# Altium PCB HumFlex3.PcbDoc
Units mm, origin at the board's own origin, x right, y up, seen from the top; angles counter-clockwise.
Board outline 87 x 100 mm, 2 copper layers (Top Layer, Bottom Layer), stack 0.187 mm thick; 35 components, 18 nets, 191 pads, 848 vias.
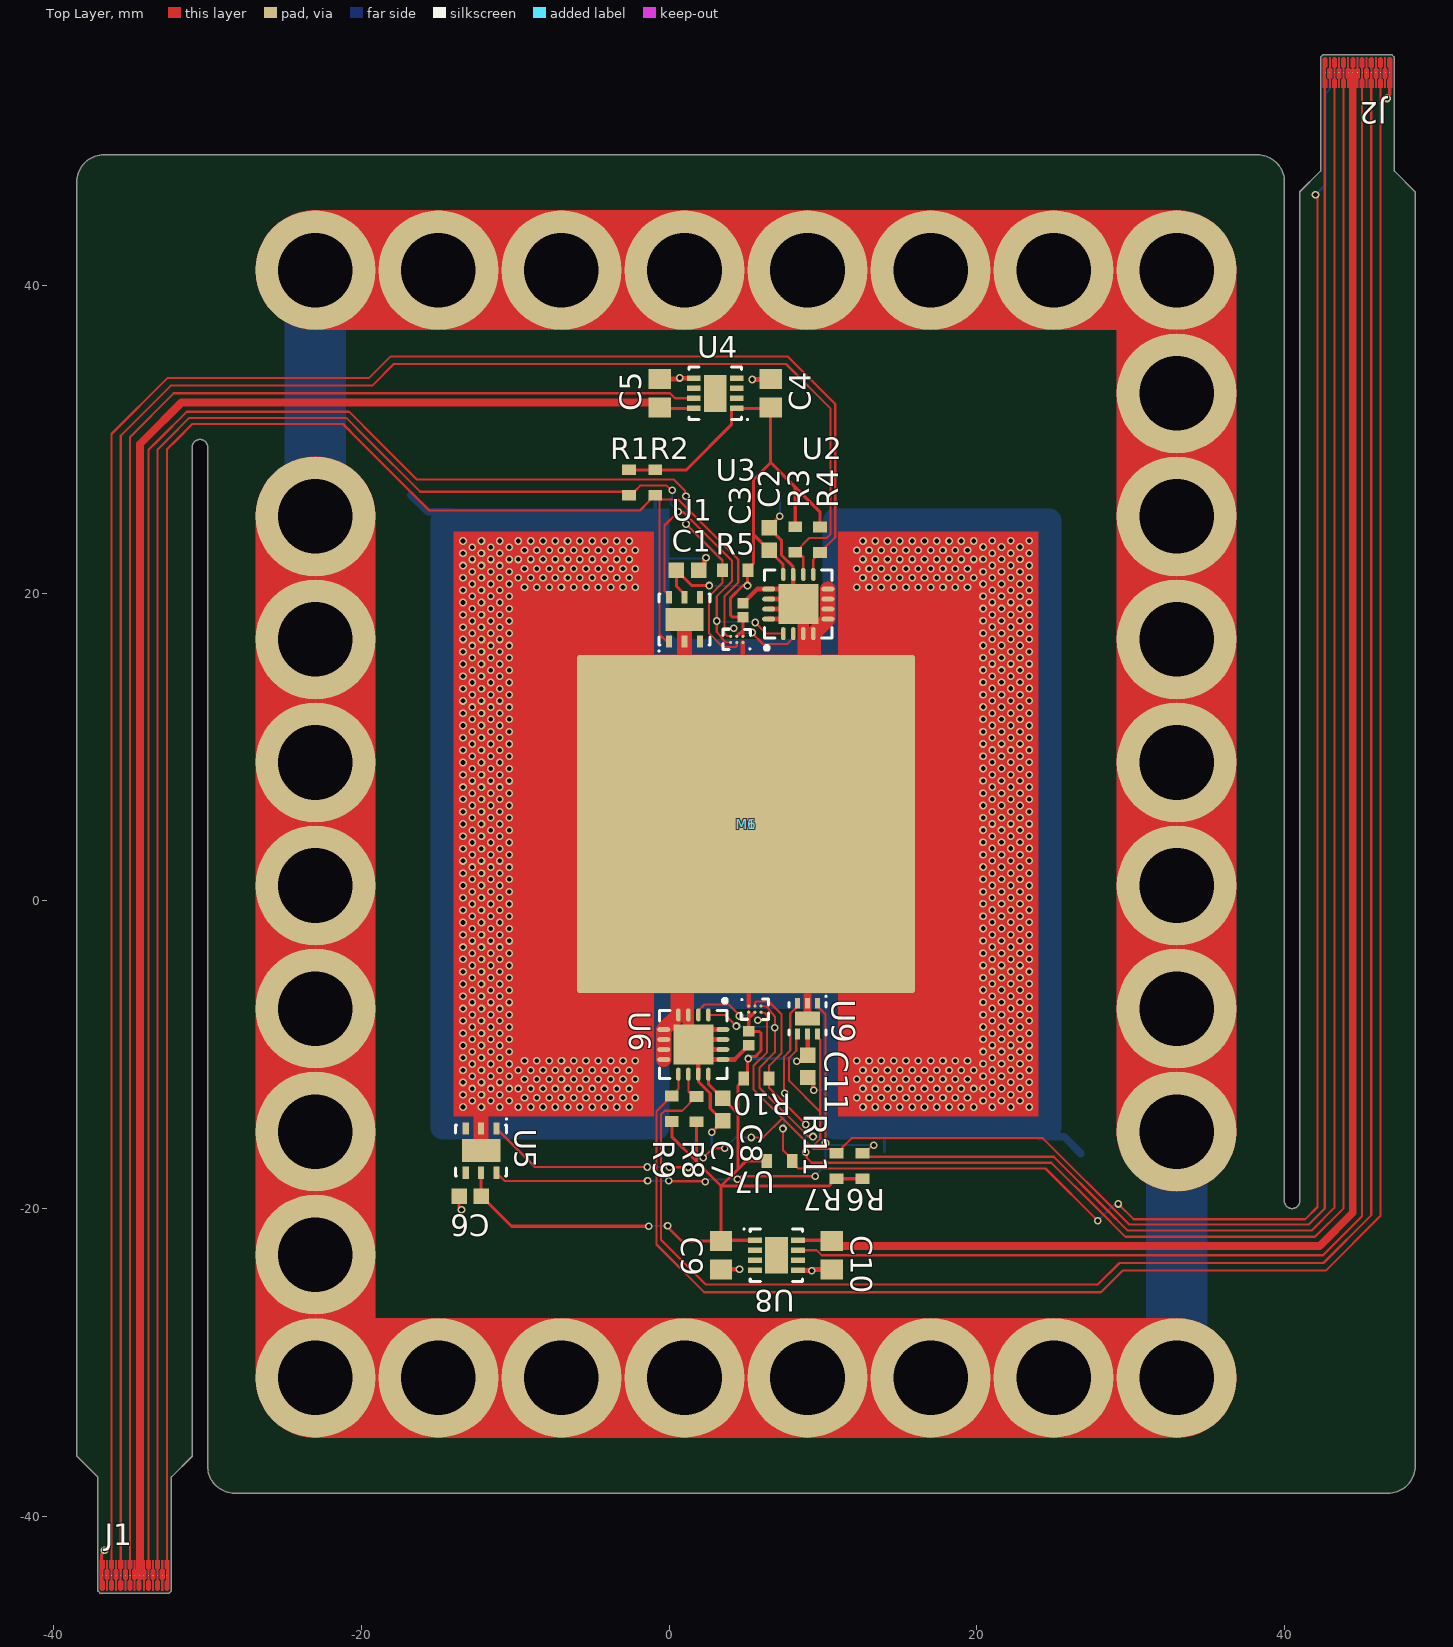
[diagram p0: Top Layer view]
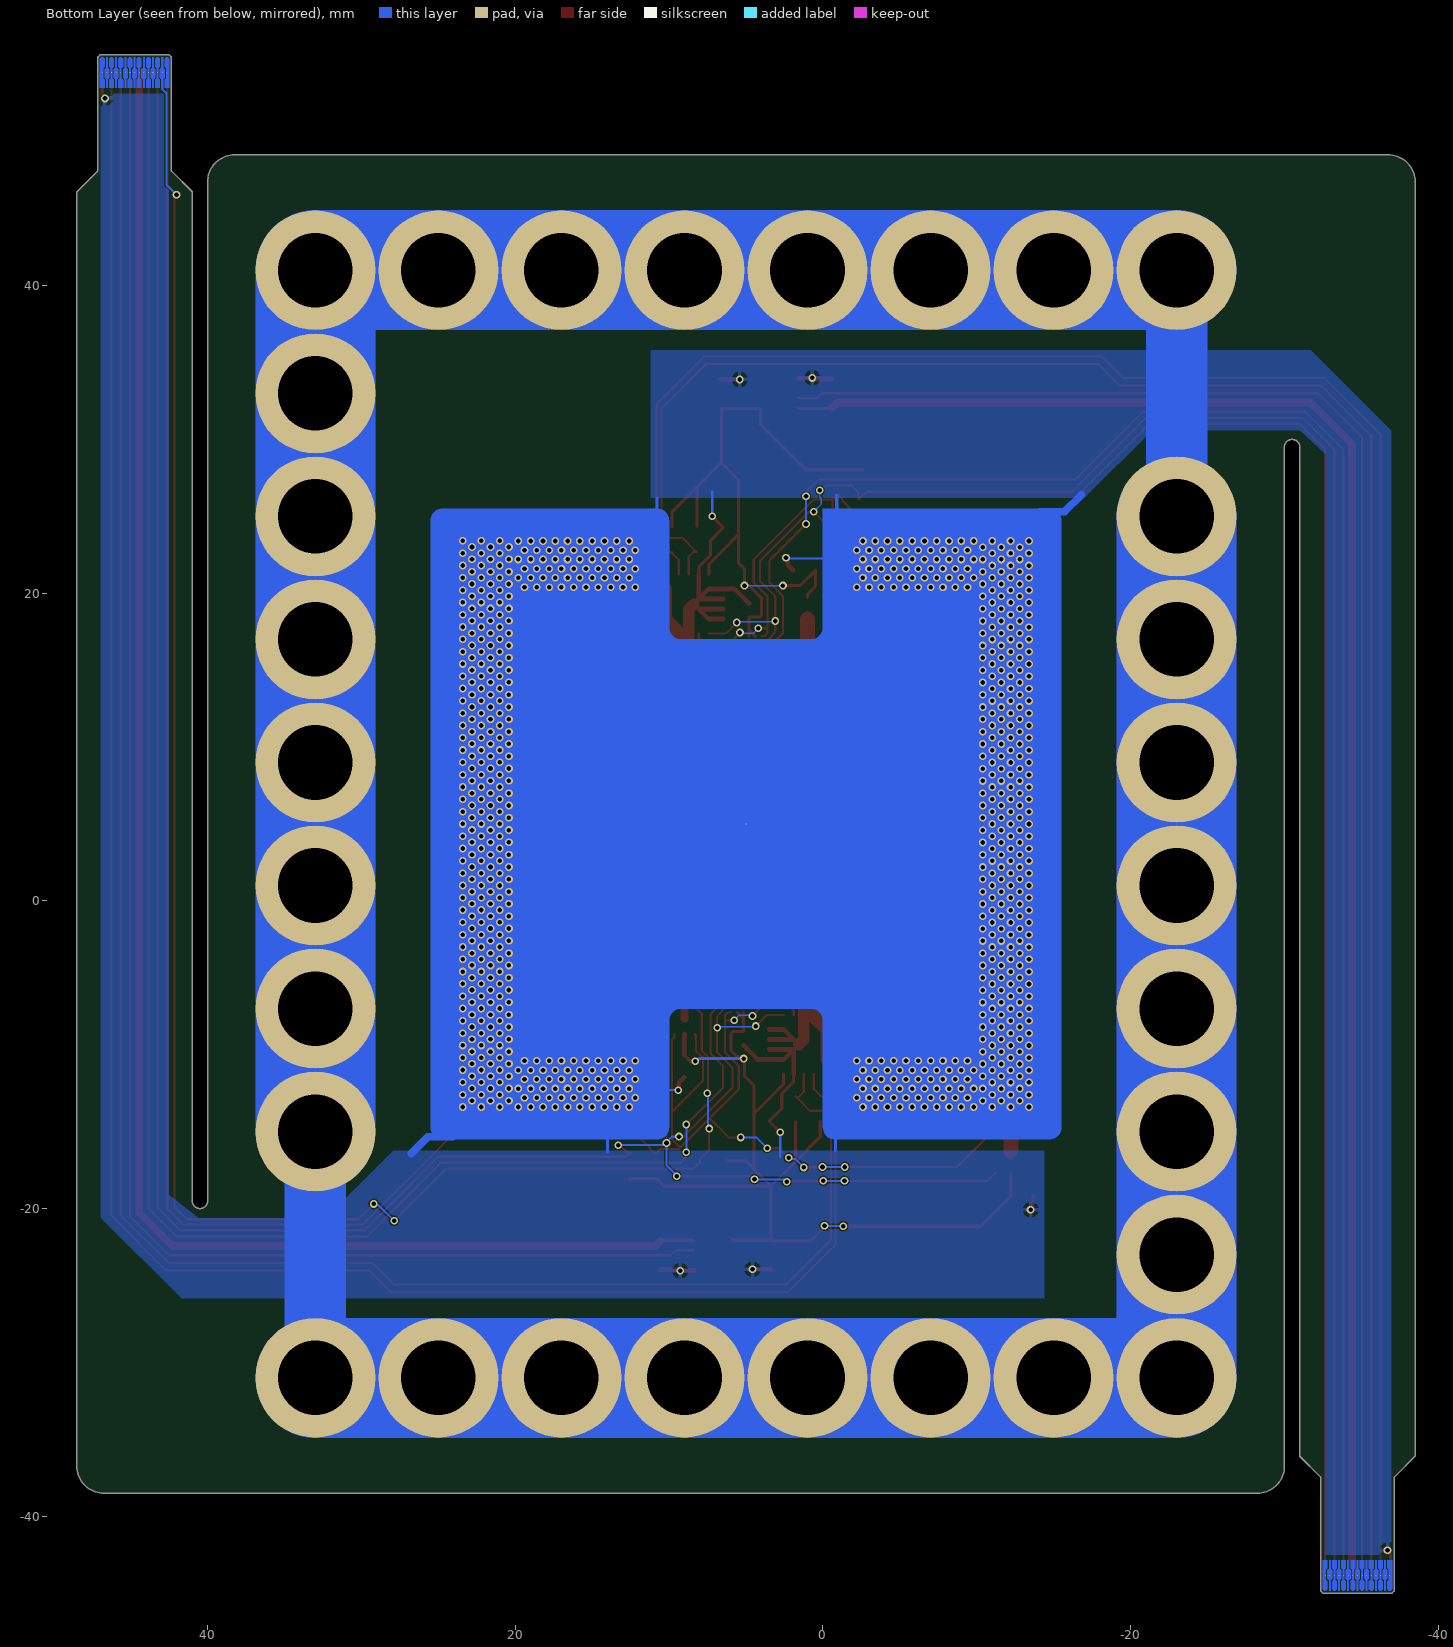
[diagram p1: Bottom Layer view, seen from below]

## Layer stack, top to bottom
Stiffener 1: core 0.1016, Core-009, Dk 4.5
Board Layer Stack Top Coverlay: solder mask 0.012, FC-001, Dk 4
Top Layer: signal copper 0.0175
Dielectric 1: core 0.0508, Core-001, Dk 4.1
Bottom Layer: signal copper 0.0175
Board Layer Stack Bottom Coverlay: solder mask 0.012, FC-001, Dk 4

## Board outline
-37,-45 -32.5,-45 -32.35,-44.85 -32.35,-37.45 -31,-36.1 -31,-30 -31,29.5 cw(c-30.5,29.5) -30.5,30 cw(c-30.5,29.5) -30,29.5 -30,-36.747 ccw(c-28.247,-36.747) -28.247,-38.5 46.747,-38.5 ccw(c46.747,-36.747) 48.5,-36.747 48.5,46.1 47.15,47.45 47.15,54.85 47,55 42.5,55 42.35,54.85 42.35,47.45 41,46.1 41,-19.5 cw(c40.5,-19.5) 40.5,-20 cw(c40.5,-19.5) 40,-19.5 40,46.747 ccw(c38.247,46.747) 38.247,48.5 -36.747,48.5 ccw(c-36.747,46.747) -38.5,46.747 -38.5,30 -38.5,-36.1 -37.15,-37.45 -37.15,-44.85

## Design rules (kind name [scope] priority, off if disabled: settings)
Clearance [All] p1: gap=0.08 ignorepadtopadclearanceinfootprint=FALSE
ComponentClearance ComponentClearance_1 [InComponent('M6')] p1: gap=0 collisioncheckmode=3 verticalgap=0 showdistances=FALSE donotcheckwithout3dbody=TRUE
ComponentClearance ComponentClearance_2 [InComponent('M1')] p2: gap=0 collisioncheckmode=3 verticalgap=0 showdistances=FALSE donotcheckwithout3dbody=TRUE
ComponentClearance [All] p3: gap=0.254 collisioncheckmode=3 verticalgap=0.254 showdistances=FALSE
HoleSize [All] p1: absolutevalues=TRUE maxlimit=6 minlimit=0.2 maxpercent=80.000 minpercent=20.000
HoleToHoleClearance [All] p1: gap=0.3 allowstackedmicrovias=TRUE
MinimumAnnularRing [All] p1: minimumring=0.1
MinimumSolderMaskSliver [HasFootprint('PeltierElement')] p1: minsoldermaskwidth=0
MinimumSolderMaskSliver MinimumSolderMaskSliver_1 [All] p2: minsoldermaskwidth=0
PolygonConnect [All] p1: connectstyle=Relief reliefconductorwidth=0.254 reliefentries=4 polygonreliefangle="90 Angle" airgapwidth=0.254
RoutingVias [All] p1: holewidth=0.711 width=1.27 viastyle="Through Hole" minholewidth=0.711 minwidth=1.27 maxholewidth=0.711 maxwidth=1.27
SilkToSilkClearance [All] p1: silktosilkclearance=0.15
SilkToSolderMaskClearance [IsPad] p1: minsilkscreentomaskgap=0.15 clearancetoexposedcopper=TRUE
SolderMaskExpansion [All] p1: expansion=0.1 istentingtop=FALSE
Width [All] p1: maxlimit=8 minlimit=0.08 preferedwidth=0.2
24 further rules are at their usual default settings.

## Classes and differential pairs
component class HumFlex2_upper: C1 C2 C3 C4 C5 J1 R1 R2 R3 R4 R5 U1 U2 U3 U4
component class HumFlex2_mech: M1 M6
component class HumFlex2_lower: C6 C7 C8 C9 C10 C11 J2 R6 R7 R8 R9 R10 R11 U5 U6 U7 U8 U9

## Components (designator, comment, footprint, x,y, rotation, side; value= is the part's Value field where it differs from the comment)
C1 "100nF" CAP_SM0603_YAGEOCC2_N 1.2,21.5 r180 top
C2 "100nF" CAP_SM0603_YAGEOCC2_N 6.5,23.527 r270 top
C3 "10nF" CAP_SM0402_YAGEOCC2_N 4.8,18.9 r90 top
C4 "1uF" CAP_SM0805_YAGEOCC2_N 6.6,33 r270 top
C5 "1uF" CAP_SM0805_YAGEOCC2_N -0.6,33 r270 top
C6 "100nF" CAP_SM0603_YAGEOCC2_N -12.927,-19.2 r0 top
C7 "100nF" CAP_SM0603_YAGEOCC2_N 3.475,-13.564 r90 top
C8 "10nF" CAP_SM0402_YAGEOCC2_N 5.175,-8.937 r270 top
C9 "1uF" CAP_SM0805_YAGEOCC2_N 3.375,-23.037 r90 top
C10 "1uF" CAP_SM0805_YAGEOCC2_N 10.575,-23.037 r90 top
C11 "100nF" CAP_SM0603_YAGEOCC2_N 9.025,-10.75 r90 top
J1 "Dual Row 15Pos FPC Contacts" AYF331535_FPC -32.65,-44.85 r180 top
J2 "Dual Row 15Pos FPC Contacts" AYF331535_FPC 42.65,54.85 r0 top
M1 "Peltier Element" PeltierElement2 5,5 r90 top locked
M6 "Lego_Mount" LEGO_MOUNT 5,5 r0 top
R1 "10K" RES_SM0603_YAGEORC_N -2.6,27.2 r90 top
R2 "10K" RES_SM0603_YAGEORC_N -0.9,27.2 r90 top
R3 "10K" RES_SM0603_YAGEORC_N 8.2,23.5 r90 top
R4 "10K" RES_SM0603_YAGEORC_N 9.8,23.473 r90 top
R5 "10K" RES_SM0603_YAGEORC_N 4.3,21.5 r0 top
R6 "10K" RES_SM0603_YAGEORC_N 12.575,-17.237 r270 top
R7 "10K" RES_SM0603_YAGEORC_N 10.875,-17.237 r270 top
R8 "10K" RES_SM0603_YAGEORC_N 1.775,-13.537 r270 top
R9 "10K" RES_SM0603_YAGEORC_N 0.175,-13.51 r270 top
R10 "10K" RES_SM0603_YAGEORC_N 5.675,-11.537 r180 top
R11 "10K" RES_SM0603_YAGEORC_N 7.173,-16.9 r180 top
U1 "SI7051-A20-IMR" SI7050/1/2/3/4/5 1,18.3 r90 top
U2 "ADT7422CCPZ-RL7" ADT7422_QFN 8.4,19.3 r90 top
U3 "AS6221" AS6221_BGA 4.4,17 r180 top
U4 "TPS78433" TPS784xxxQDRBRQ1_SON 3,33 r180 top
U5 "SI7051-A20-IMR" SI7050/1/2/3/4/5 -12.225,-16.235 r270 top
U6 "ADT7422CCPZ-RL7" ADT7422_QFN 1.575,-9.337 r270 top
U7 "AS6221" AS6221_BGA 5.575,-7.037 r0 top
U8 "TPS78433" TPS784xxxQDRBRQ1_SON 6.975,-23.037 r0 top
U9 "TMP117" TMP117(N/M)AIDRV_WSON 9,-7.65 r270 top

## Footprints (in the part's own frame and the unit in brackets; to place one, negate y for a bottom-side part, rotate by r counter-clockwise, add the part's x,y. Pads: shape width x height; smd on the part's side, far side on the other; paste and mask are expansions set on the pad)
ADT7422_QFN [mm] "QFN, 16-Leads, Body 4,00x4,00mm, Pitch 0,65mm, Thermal Pad 2,60x2,60mm, IPC Medium Density"
  oval 0.85x0.3 smd: 1(-1.925,0.975) 2(-1.925,0.325) 3(-1.925,-0.325) 4(-1.925,-0.975) 9(1.925,-0.975) 10(1.925,-0.325) 11(1.925,0.325) 12(1.925,0.975)
  oval 0.3x0.85 smd: 5(-0.975,-1.925) 6(-0.325,-1.925) 7(0.325,-1.925) 8(0.975,-1.925) 13(0.975,1.925) 14(0.325,1.925) 15(-0.325,1.925) 16(-0.975,1.925)
  rect 2.6x2.6 smd: 17(0,0)
  silkscreen extent -2.97,-2.2 2.2,2.2, body extent -2.05,-2.05 2.05,2.05, height 0.8
AS6221_BGA [mm] "BGA, 6-Leads, Body 1,02x1,50mmx0,53mm, Pitch 0,40mm"
  round 0.2 smd: A1(-0.4,0.2) A2(0,0.2) A3(0.4,0.2) B1(-0.4,-0.2) B2(0,-0.2) B3(0.4,-0.2)
  silkscreen extent -0.9,-0.66 0.89,0.66, body extent -0.74,-0.51 0.74,0.51, height 0.55
AYF331535_FPC [mil]
  round 1 all layers, no hole paste-99999 mask+3.94: 1(0,-39.37) 2(11.81,-39.37)
  round 1 all layers, no hole paste-99999: 3(23.62,-39.37) 4(35.43,-39.37) 5(47.24,-39.37) 6(59.06,-39.37) 7(70.87,-39.37) 8(82.68,-39.37) 9(94.49,-39.37) 10(106.3,-39.37) 11(118.11,-39.37) 12(129.92,-39.37) 13(141.73,-39.37) 14(153.54,-39.37) 15(165.35,-39.37)
  Top Layer region: -5.91,-78.74 -5.91,-3.94 -1.97,0 -1.97,0 1.97,0 5.91,-3.94 5.91,-24.61 1.97,-28.54 1.97,-54.13 5.91,-58.07 5.91,-78.74
  Top Layer region: 5.91,-52.17 5.91,-30.51 9.84,-26.57 9.84,0 13.78,0 13.78,-26.57 17.72,-30.51 17.72,-52.17 13.78,-56.1 13.78,-78.74 9.84,-78.74 9.84,-56.1
  Top Layer region: 17.72,-78.74 17.72,-58.07 21.65,-54.13 21.65,-28.54 17.72,-24.61 17.72,-3.94 21.65,0 25.59,0 29.53,-3.94 29.53,-24.61 25.59,-28.54 25.59,-54.13 29.53,-58.07 29.53,-78.74
  Top Layer region: 29.53,-52.17 29.53,-30.51 33.46,-26.57 33.46,0 37.4,0 37.4,-26.57 41.34,-30.51 41.34,-52.17 37.4,-56.1 37.4,-78.74 33.46,-78.74 33.46,-56.1
  Top Layer region: 41.34,-78.74 41.34,-58.07 45.28,-54.13 45.28,-28.54 41.34,-24.61 41.34,-3.94 45.28,0 49.21,0 53.15,-3.94 53.15,-24.61 49.21,-28.54 49.21,-54.13 53.15,-58.07 53.15,-78.74
  Top Layer region: 64.96,-78.74 64.96,-58.07 68.9,-54.13 68.9,-28.54 64.96,-24.61 64.96,-3.94 68.9,0 72.83,0 76.77,-3.94 76.77,-24.61 72.83,-28.54 72.83,-54.13 76.77,-58.07 76.77,-78.74
  Top Layer region: 53.15,-52.17 53.15,-30.51 57.09,-26.57 57.09,0 61.02,0 61.02,-26.57 64.96,-30.51 64.96,-52.17 61.02,-56.1 61.02,-78.74 57.09,-78.74 57.09,-56.1
  Top Layer region: 76.77,-52.17 76.77,-30.51 80.71,-26.57 80.71,0 84.65,0 84.65,-26.57 88.58,-30.51 88.58,-52.17 84.65,-56.1 84.65,-78.74 80.71,-78.74 80.71,-56.1
  Top Layer region: 88.58,-78.74 88.58,-58.07 92.52,-54.13 92.52,-28.54 88.58,-24.61 88.58,-3.94 92.52,0 96.46,0 100.39,-3.94 100.39,-24.61 96.46,-28.54 96.46,-54.13 100.39,-58.07 100.39,-78.74
  Top Layer region: 100.39,-52.17 100.39,-30.51 104.33,-26.57 104.33,0 108.27,0 108.27,-26.57 112.2,-30.51 112.2,-52.17 108.27,-56.1 108.27,-78.74 104.33,-78.74 104.33,-56.1
  Top Layer region: 112.2,-78.74 112.2,-58.07 116.14,-54.13 116.14,-28.54 112.2,-24.61 112.2,-3.94 116.14,0 120.08,0 124.02,-3.94 124.02,-24.61 120.08,-28.54 120.08,-54.13 124.02,-58.07 124.02,-78.74
  Top Layer region: 124.02,-52.17 124.02,-30.51 127.95,-26.57 127.95,0 131.89,0 131.89,-26.57 135.83,-30.51 135.83,-52.17 131.89,-56.1 131.89,-78.74 127.95,-78.74 127.95,-56.1
  Top Layer region: 135.83,-78.74 135.83,-58.07 139.76,-54.13 139.76,-28.54 135.83,-24.61 135.83,-3.94 139.76,0 143.7,0 147.64,-3.94 147.64,-24.61 143.7,-28.54 143.7,-54.13 147.64,-58.07 147.64,-78.74
  Top Layer region: 147.64,-52.17 147.64,-30.51 151.57,-26.57 151.57,0 155.51,0 155.51,-26.57 159.45,-30.51 159.45,-52.17 155.51,-56.1 155.51,-78.74 151.57,-78.74 151.57,-56.1
  Top Layer region: 159.45,-78.74 159.45,-58.07 163.39,-54.13 163.39,-54.13 163.39,-28.54 159.45,-24.61 159.45,-24.61 159.45,-3.94 163.39,0 167.32,0 171.26,-3.94 171.26,-78.74
  Bottom Layer region: -5.91,-78.74 -5.91,-3.94 -1.97,0 -1.97,0 1.97,0 5.91,-3.94 5.91,-24.61 1.97,-28.54 1.97,-54.13 5.91,-58.07 5.91,-78.74
  Bottom Layer region: 5.91,-52.17 5.91,-30.51 9.84,-26.57 9.84,0 13.78,0 13.78,-26.57 17.72,-30.51 17.72,-52.17 13.78,-56.1 13.78,-78.74 9.84,-78.74 9.84,-56.1
  Bottom Layer region: 17.72,-78.74 17.72,-58.07 21.65,-54.13 21.65,-28.54 17.72,-24.61 17.72,-3.94 21.65,0 25.59,0 29.53,-3.94 29.53,-24.61 25.59,-28.54 25.59,-54.13 29.53,-58.07 29.53,-78.74
  Bottom Layer region: 29.53,-52.17 29.53,-30.51 33.46,-26.57 33.46,0 37.4,0 37.4,-26.57 41.34,-30.51 41.34,-52.17 37.4,-56.1 37.4,-78.74 33.46,-78.74 33.46,-56.1
  Bottom Layer region: 41.34,-78.74 41.34,-58.07 45.28,-54.13 45.28,-28.54 41.34,-24.61 41.34,-3.94 45.28,0 49.21,0 53.15,-3.94 53.15,-24.61 49.21,-28.54 49.21,-54.13 53.15,-58.07 53.15,-78.74
  Bottom Layer region: 64.96,-78.74 64.96,-58.07 68.9,-54.13 68.9,-28.54 64.96,-24.61 64.96,-3.94 68.9,0 72.83,0 76.77,-3.94 76.77,-24.61 72.83,-28.54 72.83,-54.13 76.77,-58.07 76.77,-78.74
  Bottom Layer region: 53.15,-52.17 53.15,-30.51 57.09,-26.57 57.09,0 61.02,0 61.02,-26.57 64.96,-30.51 64.96,-52.17 61.02,-56.1 61.02,-78.74 57.09,-78.74 57.09,-56.1
  Bottom Layer region: 76.77,-52.17 76.77,-30.51 80.71,-26.57 80.71,0 84.65,0 84.65,-26.57 88.58,-30.51 88.58,-52.17 84.65,-56.1 84.65,-78.74 80.71,-78.74 80.71,-56.1
  Bottom Layer region: 88.58,-78.74 88.58,-58.07 92.52,-54.13 92.52,-28.54 88.58,-24.61 88.58,-3.94 92.52,0 96.46,0 100.39,-3.94 100.39,-24.61 96.46,-28.54 96.46,-54.13 100.39,-58.07 100.39,-78.74
  Bottom Layer region: 100.39,-52.17 100.39,-30.51 104.33,-26.57 104.33,0 108.27,0 108.27,-26.57 112.2,-30.51 112.2,-52.17 108.27,-56.1 108.27,-78.74 104.33,-78.74 104.33,-56.1
  Bottom Layer region: 112.2,-78.74 112.2,-58.07 116.14,-54.13 116.14,-28.54 112.2,-24.61 112.2,-3.94 116.14,0 120.08,0 124.02,-3.94 124.02,-24.61 120.08,-28.54 120.08,-54.13 124.02,-58.07 124.02,-78.74
  Bottom Layer region: 124.02,-52.17 124.02,-30.51 127.95,-26.57 127.95,0 131.89,0 131.89,-26.57 135.83,-30.51 135.83,-52.17 131.89,-56.1 131.89,-78.74 127.95,-78.74 127.95,-56.1
  Bottom Layer region: 135.83,-78.74 135.83,-58.07 139.76,-54.13 139.76,-28.54 135.83,-24.61 135.83,-3.94 139.76,0 143.7,0 147.64,-3.94 147.64,-24.61 143.7,-28.54 143.7,-54.13 147.64,-58.07 147.64,-78.74
  Bottom Layer region: 147.64,-52.17 147.64,-30.51 151.57,-26.57 151.57,0 155.51,0 155.51,-26.57 159.45,-30.51 159.45,-52.17 155.51,-56.1 155.51,-78.74 151.57,-78.74 151.57,-56.1
  Bottom Layer region: 159.45,-78.74 159.45,-58.07 163.39,-54.13 163.39,-54.13 163.39,-28.54 159.45,-24.61 159.45,-24.61 159.45,-3.94 163.39,0 167.32,0 171.26,-3.94 171.26,-78.74
CAP_SM0402_YAGEOCC2_N [mm] "Capacitor, Yageo CC Class2, SM0402, IPC Medium Density"
  rect 0.68x0.72 smd: 1(-0.45,0) 2(0.45,0)
  body extent -0.55,-0.35 0.55,0.35, height 0.6
CAP_SM0603_YAGEOCC2_N [mm] "Capacitor, Yageo CC Class2, SM0603, IPC Medium Density"
  rect 1x1 smd: 1(-0.727,0) 2(0.727,0)
  body extent -0.9,-0.5 0.9,0.5, height 0.9
CAP_SM0805_YAGEOCC2_N [mm] "Capacitor, Yageo CC Class2, SM0805, IPC Medium Density"
  rect 1.3x1.45 smd: 1(-0.927,0) 2(0.927,0)
  body extent -1.1,-0.72 1.1,0.72, height 1.45
LEGO_MOUNT [mm]
  round 7.8 hole 4.85: 1(-28,-36) 1(-28,-28) 1(-28,-20) 1(-28,-12) 1(-28,-4) 1(-28,4) 1(-28,12) 1(-28,20) 1(-28,36) 1(-20,-36) 1(-20,36) 1(-12,-36) 1(-12,36) 1(-4,-36) 1(-4,36) 1(4,-36) 1(4,36) 1(12,-36) 1(12,36) 1(20,-36) 1(20,36) 1(28,-36) 1(28,-20) 1(28,-12) 1(28,-4) 1(28,4) 1(28,12) 1(28,20) 1(28,28) 1(28,36)
  Top Layer lines w7.8: -28,20 -28,-36 28,-36 ; -28,36 28,36 28,-20
  Bottom Layer lines w7.8: -28,20 -28,-36 28,-36 ; -28,36 28,36 28,-20
PeltierElement2 [mm]
  rrect2% 22x22 smd paste-2539.97: 1(0,0)
  round 0.025 smd far side paste-2539.97: 1(0,0)
  Top Layer region: -19,19 -19,6 -11,6 -11,-6 -19,-6 -19,-19 19,-19 19,-6 11,-6 11,6 19,6 19,19
  Bottom Layer region: -20.5,-19.713 -20.5,-5.787 -20.44,-5.486 -20.269,-5.231 -20.014,-5.06 -19.713,-5 -19.713,-5 -12.787,-5 -12.486,-4.94 -12.231,-4.769 -12.06,-4.514 -12,-4.213 -12,-4.213 -12,4.213 -12.06,4.514 -12.231,4.769 -12.486,4.94 -12.787,5 -12.787,5 -19.713,5 -20.014,5.06 -20.269,5.231 -20.44,5.486 -20.5,5.787 -20.5,5.787 -20.5,19.713 -20.44,20.014 -20.269,20.269 -20.014,20.44 -19.713,20.5 -19.713,20.5 19.713,20.5 20.014,20.44 20.269,20.269 20.44,20.014 20.5,19.713 20.5,19.713 20.5,5 12.787,5 12.486,4.94 12.231,4.769 12.06,4.514 12,4.213 12,4.213 12,-4.213 12.06,-4.514 12.231,-4.769 12.486,-4.94 12.787,-5 12.787,-5 19.713,-5 20.014,-5.06 20.269,-5.231 20.44,-5.486 20.5,-5.787 20.5,-5.787 20.5,-19.713 20.44,-20.014 20.269,-20.269 20.014,-20.44 19.713,-20.5 19.713,-20.5 -19.713,-20.5 -20.014,-20.44 -20.269,-20.269 -20.44,-20.014 -20.5,-19.713
  body extent -20,-20 20,20, height 8
RES_SM0603_YAGEORC_N [mm] "Resistor, Yageo RC_L, SM0603, IPC Medium Density"
  rect 0.7x0.9 smd: 1(-0.827,0) 2(0.827,0)
  body extent -0.85,-0.45 0.85,0.45, height 0.55
SI7050/1/2/3/4/5 [mm] "SON, 6-Leads, Body 3,00x3,00mm, Pitch 1,00mm, Thermal Pad 2,50x1,50mm, IPC Medium Density"
  rect 0.8x0.4 smd: 1(-1.44,1) 2(-1.44,0) 3(-1.44,-1) 4(1.44,-1) 5(1.44,0) 6(1.44,1)
  rect 1.5x2.5 smd: 7(0,0)
  silkscreen extent -2.1,-1.65 1.65,1.7, body extent -1.5,-1.5 1.5,1.5, height 0.8
TMP117(N/M)AIDRV_WSON [mm] "SON127P600-8N"
  rect 0.7x0.3 smd: 1(-0.995,0.65) 2(-0.995,0) 3(-0.995,-0.65) 4(0.995,-0.65) 5(0.995,0) 6(0.995,0.65)
  rect 0.89x1.6 smd: 7(0,0)
  silkscreen extent -1.5,-1.2 1.05,1.25, body extent -1.05,-1.05 1.05,1.05, height 0.8
TPS784xxxQDRBRQ1_SON [mm] "SON127P600-8N"
  rect 0.9x0.35 smd: 1(-1.395,0.975) 2(-1.395,0.325) 3(-1.395,-0.325) 4(-1.395,-0.975) 5(1.395,-0.975) 6(1.395,-0.325) 7(1.395,0.325) 8(1.395,0.975)
  rect 1.49x2.4 smd: 9(0,0)
  silkscreen extent -2.15,-1.7 1.7,1.75, body extent -1.55,-1.55 1.55,1.55, height 1

## Part data
C1 C2 C6 C7 C11: library part CC0603KRX7R9BB104, "CAP 100nF SM0603 X7R 50V YAGEO CC2", Manufacturer=Yageo, Package=0603, Supplier Part Number 1=1362556, Tolerance (%)=10, Voltage Rating (Volts)=50, Category=Capacitor, ComponentLink1Description="Manufacturer Website", ComponentLink1URL=http://www.yageo.com, Manufacturer Part Number=CC0603KRX7R9BB104, Supplier 1=Farnell, Supplier 2=Mouser, Supplier Part Number 2=603-CC603KRX7R9BB104
C3 C8: library part CC0402KRX7R9BB103, "CAP 10nF SM0402 X7R 50V YAGEO CC2", Manufacturer=Yageo, Manufacturer Part Number=CC0603KRX7R9BB103, Package=0603, Supplier Part Number 1=3369167, Tolerance (%)=10, Voltage Rating (Volts)=50, Category=Capacitor, ComponentLink1Description="Manufacturer Website", ComponentLink1URL=http://www.yageo.com, Supplier 1=Farnell, Supplier 2=Mouser, Supplier 3=Digi-Key, Supplier Part Number 2=603-CC402KRX7R9BB103, Supplier Part Number 3=311-1349-1-ND
C4 C5 C9 C10: library part CC0805KKX7R8BB105, "CAP 1uF SM0805 X7R 25V YAGEO CC2", Manufacturer=Yageo, Package=0805, Supplier Part Number 1=1458903, Tolerance (%)=10, Voltage Rating (Volts)=25, Category=Capacitor, ComponentLink1Description="Manufacturer Website", ComponentLink1URL=http://www.yageo.com, Manufacturer Part Number=CC0805KKX7R8BB105, Supplier 1=Farnell, Supplier 2=Digi-Key, Supplier 3=Mouser, Supplier Part Number 2=311-1456-1-ND, Supplier Part Number 3=603-CC805KKX7R8BB105
J1 J2: library part FPC_Contacts_15_DualRow
M1: library part PeltierElement, "Peltier element 40mm x 40mm"
R1 R2 R3 R4 R5 R6 R7 R8 R9 R10 R11: library part RC0603FR-0710KL, "RES 10K SM0603 YAGEO RC_L", Manufacturer=Yageo, Package=0603, Power (Watts)=0.1, Resistance (Ohms)=10000, Supplier Part Number 1=9238603, Tolerance (%)=1, Category=Resistor, ComponentLink1Description="Manufacturer Website", ComponentLink1URL=http://www.yageo.com, Manufacturer Part Number=RC0603FR-0710KL, Supplier 1=Farnell, Supplier 2=Digi-Key, Supplier Part Number 2=311-10.0KHRCT-ND
U1 U5: "Si7051-A20 Temperature Sensor ±0.1°C maximum accuracy, Digital I2C, -40°C ~ 125°C 14b 6-DFN (3x3)", Supplier Part Number 1=3265013RL, Supplier 1=Farnell, Supplier 2=Mouser, Supplier 3=Digi-Key, Supplier Part Number 2=634-SI7051-A20-IMR, Supplier Part Number 3=336-4764-1-ND
U2 U6: "ADT7422 Temperature Sensor, ±0.1°C Accuracy, 16b, Digital I2C /  -40°C bis 125°C 16-LFCSP-WQ (4x4)", Supplier Part Number 1=584-ADT7422CCPZ-RL7, Supplier 1=Mouser, Supplier 2=Digi-Key, Supplier Part Number 2=505-ADT7422CCPZ-RL7CT-ND
U3 U7: library part AS6221-AWLT-S, "AS6221 Temperature Sensor Digital -40°C ~ 125°C 16b 6-WLCSP (1.5x1.03)", Supplier Part Number 1=985-AS6221-AWLT-S, Supplier 1=Mouser, Supplier 2=Digi-Key, Supplier Part Number 2=4991-AS6221-AWLT-SCT-ND
U4 U8: library part TPS78433QWDRBRQ1, "TPS78433-Q1 3.3V, 300-mA, High-PSRR Low-Dropout Voltage Regulator With High Accuracy and Enable,  8-SON (3x3)", Supplier Part Number 1=595-TPS78433QWDRBRQ1, Supplier 1=Mouser, Supplier 2=Digi-Key, Supplier Part Number 2=296-TPS78433QWDRBRQ1CT-ND
U9: library part TMP117NAIDRVR, "TMP117 High-Accuracy, Low-Power, Digital Temperature Sensor, -55°C bis 150°C, 16b 6-WSON (2x2)", Supplier Part Number 1=595-TMP117NAIDRVR, Supplier 1=Mouser, Supplier 2=Digi-Key, Supplier Part Number 2=296-51836-6-ND

## Via types
v1: diameter 0.5, hole 0.3, Top Layer to Bottom Layer, tented top, 798 vias
v2: diameter 0.5, hole 0.3, Top Layer to Bottom Layer, tented both sides, 49 vias
v3: diameter 0.5, hole 0.3, Top Layer to Bottom Layer, 1 vias

## Nets (pads, with @x,y where several pads share a name; then routed paths per layer and width w, separated by ;. In a path a pad name is that pad's centre, name@x,y a point inside that pad or via, vN(x,y) a via of type N, cw(c..) or ccw(c..) an arc to the next point about the centre after c; other vN are vias at no path point)
3V: C1.2 C2.2 C3.1 C4.2 R1.2 R2.2 R3.2 R4.2 R5.2 U1.5 U2.12 U3.B1 U3.B2 U4.1 | length 47.4
  Top Layer w0.2: R1.2 R2.2 1.127,28.027 4.045,30.945 4.045,31.95 4.12,32.025 U4.1 6.552,32.025 C4.2 6.6,28.5 ; U1.5 1,19.94 0.473,20.467 C1.2 1.473,20.5 v2(2.6,20.5) ; U3.B2 4.8,17.6 ; U3.B1 4.8,17.6 ; U2.12 7.406,21.244 7.406,21.894 C2.2 5.5,23.8 ; R3.2 8.2,26.9 ; R4.2 9.8,25.3 8.2,26.9 ; 4.8,17.6 C3.1 4.117,18.45 4,18.567 4,19.7 4.8,20.5 v2(5.1,20.5) 5.1,21.573 5.377,21.85 5.383,21.85 5.5,21.967 5.5,23.8 ; 5.5,23.8 5.5,27.4 6.6,28.5 ; 6.6,28.5 8.2,26.9
  Bottom Layer w0.1: v2(2.6,20.5) v2(5.1,20.5)
3V_B: C6.2 C7.2 C8.1 C9.2 C11.2 R6.2 R7.2 R8.2 R9.2 R10.2 R11.2 U5.5 U6.12 U7.B1 U7.B2 U8.1 U9.5 | length 66.9
  Top Layer w0.2: U5.5 -12.225,-19.175 C6.2 -10.25,-21.15 v2(-1.325,-21.15) ; v2(-0.1,-21.125) -0.1,-21.2 0.81,-22.11 C9.2 ; R9.2 0.175,-15.337 1.775,-16.937 ; R8.2 1.775,-16.937 ; U6.12 2.57,-11.281 2.57,-11.931 C7.2 4.475,-13.837 ; U7.B1 5.175,-7.637 ; U7.B2 5.175,-7.637 ; U8.1@5.93,-21.987 5.855,-22.062 U8.1 3.423,-22.062 C9.2 ; R11.2 5.012,-16.9 4.475,-17.437 ; v2(8.3,-10.425) v2(8.3,-10.425) 8.625,-10.423 C11.2 ; R6.2 10.775,-18.064 10.525,-18.314 10.525,-18.414 10.402,-18.537 3.375,-18.537 ; 1.775,-16.937 3.375,-18.537 ; C9.2 3.375,-18.537 ; 3.375,-18.537 4.475,-17.437 ; 4.475,-17.437 4.475,-13.837 ; 4.475,-13.837 4.475,-12.004 4.593,-11.887 4.598,-11.887 5.098,-11.387 5.098,-10.302 v2(5.15,-10.25) 5.231,-10.25 5.36,-10.121 5.591,-10.121 5.975,-9.737 5.975,-8.604 5.858,-8.487 C8.1 5.175,-7.637
  Top Layer w0.3: U9.5 9,-8.845 9.025,-8.87 C11.2
  Bottom Layer w0.14: v2(-1.325,-21.15) -1.312,-21.137 -0.112,-21.137 v2(-0.1,-21.125)
  Bottom Layer w0.2: v2(5.15,-10.25) 8.044,-10.25 8.219,-10.425 v2(8.3,-10.425)
GND: C1.1 C2.1 C3.2 C4.1 C5.1 C6.1 C7.1 C8.2 C9.1 C10.1 C11.1 J1.15 J2.15 M1.1 M6.1 U1.2 U1.7 U2.3 U2.4 U2.5 U2.6 U2.7 U2.8 U2.11 U2.13 U2.14 U2.15 U2.16 U2.17 U3.A1 U4.5 U5.2 U5.7 U6.3 U6.4 U6.5 U6.6 U6.7 U6.8 U6.11 U6.13 U6.14 U6.15 U6.16 U6.17 U7.A1 U8.5 U9.2 U9.7 | length 305.8
  Top Layer w0.14: 46.85,52.925 J2.15
  Top Layer w0.2: -36.9,-43.85 -36.9,-42.474 -36.7,-42.274 v2(-36.7,-42.207) ; C6.1 -13.654,-19.921 v2(-13.5,-20.075) ; U6.11 1.914,-11.275 1.914,-11.76 2.675,-12.522 2.675,-13.491 C7.1 3.475,-14.337 v2(2.775,-15.037) ; v2(7.2,25) 6.5,24.3 C2.1 7.3,23.454 7.3,22.485 8.062,21.723 8.062,21.238 U2.11 ; v3(46.676,52.17) 46.676,52.252 46.85,52.426 46.85,52.925
  Top Layer w0.3: C5.1 0.573,33.927 0.646,34 v2(0.7,34) 0.713,33.988 1.593,33.988 U4.5 ; U6.11 U6.17@1.9,-9.662 ; C1.1 2.277,21.85 2.277,22.123 2.4,22.246 v2(2.4,22.3) ; C9.1 3.402,-23.937 v2(4.575,-23.937) ; U6.14 U6.17@1.9,-9.662 ; U6.15 U6.17@1.9,-9.012 ; U6.16 2.55,-8.362 U6.17@1.9,-9.012 ; U3.A1 4.8,5.2 M1.1@5,5 ; C3.2 4.82,19.35 5.01,19.54 5.01,19.56 5.725,20.275 U2.13 7.425,20.275 U2.17@8.075,19.625 ; C8.2 5.155,-9.387 4.965,-9.577 4.965,-9.597 4.25,-10.312 U6.13 2.55,-10.312 U6.17@1.9,-9.662 ; U7.A1 M1.1@5.175,4.763 ; v2(5.4,33.9) 6.573,33.9 C4.1 ; U2.16 7.425,18.325 U2.17@8.075,18.975 ; U2.15 U2.17@8.075,18.975 ; U2.14 U2.17@8.075,19.625 ; U2.11 U2.17@8.075,19.625 ; U8.5 8.383,-24.024 9.263,-24.024 v2(9.275,-24.037) 9.33,-24.037 9.403,-23.964 C10.1 ; C11.1 9.375,-11.827 9.375,-12.275 v2(9.4,-12.3) ; U6.17@1.9,-9.662 U6.17 U6.17@1.9,-9.012 ; U2.17@8.075,18.975 U2.17 U2.17@8.075,19.625
  Top Layer w0.5: M1.1@5,5 9,1 U9.2 U9.7
  Top Layer w0.75: M1.1@0.6,-5.437 1.025,-5.437 1.25,-5.662 U6.3 1.25,-9.012 U6.17 ; U2.17 8.725,18.975 U2.3 8.725,15.625 8.95,15.4 M1.1@9.375,15.4
  Top Layer w1: U5.7 U5.2 -12.225,-13.425 v1(-12.2,-13.4) ; U6.8 U6.7 U6.6 U6.5 U6.4 0.6,-5.437 0.6,0.588 M1.1@4.975,4.963 ; U1.7 U1.2 1,9 M1.1@4.8,5.2 ; M1.1@5,5 9.375,9.375 9.375,15.4 U2.4 U2.5 U2.6 U2.7 U2.8
  Bottom Layer w0.14: v1(-2.6,22.2) -2.55,22.25 2.35,22.25 v2(2.4,22.3) ; 2.775,-16.637 v2(2.775,-15.037) ; v2(7.2,25) 7.2,26.6 ; v2(9.4,-12.3) 11.137,-12.3 11.238,-12.2 12.539,-12.2 v1@12.575,-12.237
  Bottom Layer w0.2: v1(-2.6,23.4) -0.9,25.1 -0.9,26.4 ; -0.825,-16.237 -0.825,-0.837 4.975,4.963 ; M1.1@5,5 10.8,10.8 10.8,26.2 ; v1(12.6,-13.4) 14,-14.8 14,-16.32
  Bottom Layer w0.5: -16.785,26.385 -15.7,25.3 -14.1,25.3 -13.4,24.6 v1(-13.4,23.4) ; v1@-13.45,23.35 -13.05,22.95 ; v1@23.025,-12.987 v1@23.425,-13.387 ; v1@23.375,-13.437 23.375,-14.637 24.075,-15.337 25.675,-15.337 26.76,-16.421
  Bottom Layer w1: -13.05,22.95 4.9,5 M1.1@5,5 ; 4.975,4.963 5.075,4.963 v1@23.025,-12.987
  Bottom Layer w4: M6.1@-23,25 M6.1@-23,41 ; M6.1@33,-31 M6.1@33,-15
  other v1: -13.4,-13.4 -11,-13.4 -9.8,-13.4 -9,-13.4 -8.2,-13.4 -7.4,-13.4 -6.6,-13.4 -5.8,-13.4 -5,-13.4 -4.2,-13.4 -3.4,-13.4 -2.6,-13.4 13.4,-13.4 14.2,-13.4 15,-13.4 15.8,-13.4 16.6,-13.4 17.4,-13.4 18.2,-13.4 19,-13.4 19.8,-13.4 21.012,-13.394 22.212,-13.394 23.412,-13.394 -12.8,-13 -11.6,-13 -10.4,-13 20.412,-12.994 21.612,-12.994 22.812,-12.994 -9.4,-12.8 -8.6,-12.8 -7.8,-12.8 -7,-12.8 -6.2,-12.8 -5.4,-12.8 -4.6,-12.8 -3.8,-12.8 -3,-12.8 -2.2,-12.8 12.2,-12.8 13,-12.8 13.8,-12.8 14.6,-12.8 15.4,-12.8 16.2,-12.8 17,-12.8 17.8,-12.8 18.6,-12.8 19.4,-12.8 -13.4,-12.6 -12.2,-12.6 -11,-12.6 21.012,-12.594 22.212,-12.594 23.412,-12.594 -12.8,-12.2 -11.6,-12.2 -10.4,-12.2 -9.8,-12.2 -9,-12.2 -8.2,-12.2 -7.4,-12.2 -6.6,-12.2 -5.8,-12.2 -5,-12.2 -4.2,-12.2 -3.4,-12.2 -2.6,-12.2 12.6,-12.2 13.4,-12.2 14.2,-12.2 15,-12.2 15.8,-12.2 16.6,-12.2 17.4,-12.2 18.2,-12.2 19,-12.2 19.8,-12.2 20.412,-12.194 21.612,-12.194 22.812,-12.194 -13.4,-11.8 -12.2,-11.8 -11,-11.8 21.012,-11.794 22.212,-11.794 23.412,-11.794 -9.4,-11.6 -8.6,-11.6 -7.8,-11.6 -7,-11.6 -6.2,-11.6 -5.4,-11.6 -4.6,-11.6 -3.8,-11.6 -3,-11.6 -2.2,-11.6 12.2,-11.6 13,-11.6 13.8,-11.6 14.6,-11.6 15.4,-11.6 16.2,-11.6 17,-11.6 17.8,-11.6 18.6,-11.6 19.4,-11.6 -12.8,-11.4 -11.6,-11.4 -10.4,-11.4 20.412,-11.394 21.612,-11.394 22.812,-11.394 -13.4,-11 -12.2,-11 -11,-11 -9.8,-11 -9,-11 -8.2,-11 -7.4,-11 -6.6,-11 -5.8,-11 -5,-11 -4.2,-11 -3.4,-11 -2.6,-11 12.6,-11 13.4,-11 14.2,-11 15,-11 15.8,-11 16.6,-11 17.4,-11 18.2,-11 19,-11 19.8,-11 21.012,-10.994 22.212,-10.994 23.412,-10.994 -12.8,-10.6 -11.6,-10.6 -10.4,-10.6 20.412,-10.594 21.612,-10.594 22.812,-10.594 -9.4,-10.4 -8.6,-10.4 -7.8,-10.4 -7,-10.4 -6.2,-10.4 -5.4,-10.4 -4.6,-10.4 -3.8,-10.4 -3,-10.4 -2.2,-10.4 12.2,-10.4 13,-10.4 13.8,-10.4 14.6,-10.4 15.4,-10.4 16.2,-10.4 17,-10.4 17.8,-10.4 18.6,-10.4 19.4,-10.4 -13.4,-10.2 -12.2,-10.2 -11,-10.2 21.012,-10.194 22.212,-10.194 23.412,-10.194 -12.8,-9.8 -11.6,-9.8 -10.4,-9.8 20.412,-9.794 21.612,-9.794 22.812,-9.794 -13.4,-9.4 -12.2,-9.4 -11,-9.4 21.012,-9.394 22.212,-9.394 23.412,-9.394 -12.8,-9 -11.6,-9 -10.4,-9 20.412,-8.994 21.612,-8.994 22.812,-8.994 -13.4,-8.6 -12.2,-8.6 -11,-8.6 21.012,-8.594 22.212,-8.594 23.412,-8.594 -12.8,-8.2 -11.6,-8.2 -10.4,-8.2 20.412,-8.194 21.612,-8.194 22.812,-8.194 -13.4,-7.8 -12.2,-7.8 -11,-7.8 21.012,-7.794 22.212,-7.794 23.412,-7.794 -12.8,-7.4 -11.6,-7.4 -10.4,-7.4 20.412,-7.394 21.612,-7.394 22.812,-7.394 -13.4,-7 -12.2,-7 -11,-7 21.012,-6.994 22.212,-6.994 23.412,-6.994 -12.8,-6.6 -11.6,-6.6 -10.4,-6.6 20.412,-6.594 21.612,-6.594 22.812,-6.594 -13.4,-6.2 -12.2,-6.2 -11,-6.2 21.012,-6.194 22.212,-6.194 23.412,-6.194 -12.8,-5.8 -11.6,-5.8 -10.4,-5.8 20.412,-5.794 21.612,-5.794 22.812,-5.794 -13.4,-5.4 -12.2,-5.4 -11,-5.4 21.012,-5.394 22.212,-5.394 23.412,-5.394 -12.8,-5 -11.6,-5 -10.4,-5 20.412,-4.994 21.612,-4.994 22.812,-4.994 -13.4,-4.6 -12.2,-4.6 -11,-4.6 21.012,-4.594 22.212,-4.594 23.412,-4.594 -12.8,-4.2 -11.6,-4.2 -10.4,-4.2 20.412,-4.194 21.612,-4.194 22.812,-4.194 -13.4,-3.8 -12.2,-3.8 -11,-3.8 21.012,-3.794 22.212,-3.794 23.412,-3.794 -12.8,-3.4 -11.6,-3.4 -10.4,-3.4 20.412,-3.394 21.612,-3.394 22.812,-3.394 -13.4,-3 -12.2,-3 -11,-3 21.012,-2.994 22.212,-2.994 23.412,-2.994 -12.8,-2.6 -11.6,-2.6 -10.4,-2.6 20.412,-2.594 21.612,-2.594 22.812,-2.594 -13.4,-2.2 -12.2,-2.2 -11,-2.2 21.012,-2.194 22.212,-2.194 23.412,-2.194 -12.8,-1.8 -11.6,-1.8 -10.4,-1.8 20.412,-1.794 21.612,-1.794 22.812,-1.794 -13.4,-1.4 -12.2,-1.4 -11,-1.4 21.012,-1.394 22.212,-1.394 23.412,-1.394 -12.8,-1 -11.6,-1 -10.4,-1 20.412,-0.994 21.612,-0.994 22.812,-0.994 -13.4,-0.6 -12.2,-0.6 -11,-0.6 21.012,-0.594 22.212,-0.594 23.412,-0.594 -12.8,-0.2 -11.6,-0.2 -10.4,-0.2 20.412,-0.194 21.612,-0.194 22.812,-0.194 -13.4,0.2 -12.2,0.2 -11,0.2 21.012,0.206 22.212,0.206 23.412,0.206 -12.8,0.6 -11.6,0.6 -10.4,0.6 20.412,0.606 21.612,0.606 22.812,0.606 -13.4,1 -12.2,1 -11,1 21.012,1.006 22.212,1.006 23.412,1.006 -12.8,1.4 -11.6,1.4 -10.4,1.4 20.412,1.406 21.612,1.406 22.812,1.406 -13.4,1.8 -12.2,1.8 -11,1.8 21.012,1.806 22.212,1.806 23.412,1.806 -12.8,2.2 -11.6,2.2 -10.4,2.2 20.412,2.206 21.612,2.206 22.812,2.206 -13.4,2.6 -12.2,2.6 -11,2.6 21.012,2.606 22.212,2.606 23.412,2.606 -12.8,3 -11.6,3 -10.4,3 20.412,3.006 21.612,3.006 22.812,3.006 -13.4,3.4 -12.2,3.4 -11,3.4 21.012,3.406 22.212,3.406 23.412,3.406 -12.8,3.8 -11.6,3.8 -10.4,3.8 20.412,3.806 21.612,3.806 22.812,3.806 -13.4,4.2 -12.2,4.2 -11,4.2 21.012,4.206 22.212,4.206 23.412,4.206 -12.8,4.6 -11.6,4.6 -10.4,4.6 20.412,4.606 21.612,4.606 22.812,4.606 -13.4,5 -12.2,5 -11,5 21.012,5.006 22.212,5.006 23.412,5.006 -12.8,5.4 -11.6,5.4 -10.4,5.4 20.412,5.406 21.612,5.406 22.812,5.406 -13.4,5.8 -12.2,5.8 -11,5.8 21.012,5.806 22.212,5.806 23.412,5.806 -12.8,6.2 -11.6,6.2 -10.4,6.2 20.412,6.206 21.612,6.206 22.812,6.206 -13.4,6.6 -12.2,6.6 -11,6.6 21.012,6.606 22.212,6.606 23.412,6.606 -12.8,7 -11.6,7 -10.4,7 20.412,7.006 21.612,7.006 22.812,7.006 -13.4,7.4 -12.2,7.4 -11,7.4 21.012,7.406 22.212,7.406 23.412,7.406 -12.8,7.8 -11.6,7.8 -10.4,7.8 20.412,7.806 21.612,7.806 22.812,7.806 -13.4,8.2 -12.2,8.2 -11,8.2 21.012,8.206 22.212,8.206 23.412,8.206 -12.8,8.6 -11.6,8.6 -10.4,8.6 20.412,8.606 21.612,8.606 22.812,8.606 -13.4,9 -12.2,9 -11,9 21.012,9.006 22.212,9.006 23.412,9.006 -12.8,9.4 -11.6,9.4 -10.4,9.4 20.412,9.406 21.612,9.406 22.812,9.406 -13.4,9.8 -12.2,9.8 -11,9.8 21.012,9.806 22.212,9.806 23.412,9.806 -12.8,10.2 -11.6,10.2 -10.4,10.2 20.412,10.206 21.612,10.206 22.812,10.206 -13.4,10.6 -12.2,10.6 -11,10.6 21.012,10.606 22.212,10.606 23.412,10.606 -12.8,11 -11.6,11 -10.4,11 20.412,11.006 21.612,11.006 22.812,11.006 -13.4,11.4 -12.2,11.4 -11,11.4 21.012,11.406 22.212,11.406 23.412,11.406 -12.8,11.8 -11.6,11.8 -10.4,11.8 20.412,11.806 21.612,11.806 22.812,11.806 -13.4,12.2 -12.2,12.2 -11,12.2 21.012,12.206 22.212,12.206 23.412,12.206 -12.8,12.6 -11.6,12.6 -10.4,12.6 20.412,12.606 21.612,12.606 22.812,12.606 -13.4,13 -12.2,13 -11,13 21.012,13.006 22.212,13.006 23.412,13.006 -12.8,13.4 -11.6,13.4 -10.4,13.4 20.412,13.406 21.612,13.406 22.812,13.406 -13.4,13.8 -12.2,13.8 -11,13.8 21.012,13.806 22.212,13.806 23.412,13.806 -12.8,14.2 -11.6,14.2 -10.4,14.2 20.412,14.206 21.612,14.206 22.812,14.206 -13.4,14.6 -12.2,14.6 -11,14.6 21.012,14.606 22.212,14.606 23.412,14.606 -12.8,15 -11.6,15 -10.4,15 20.412,15.006 21.612,15.006 22.812,15.006 -13.4,15.4 -12.2,15.4 -11,15.4 21.012,15.406 22.212,15.406 23.412,15.406 -12.8,15.8 -11.6,15.8 -10.4,15.8 20.412,15.806 21.612,15.806 22.812,15.806 -13.4,16.2 -12.2,16.2 -11,16.2 21.012,16.206 22.212,16.206 23.412,16.206 -12.8,16.6 -11.6,16.6 -10.4,16.6 20.412,16.606 21.612,16.606 22.812,16.606 -13.4,17 -12.2,17 -11,17 21.012,17.006 22.212,17.006 23.412,17.006 -12.8,17.4 -11.6,17.4 -10.4,17.4 20.412,17.406 21.612,17.406 22.812,17.406 -13.4,17.8 -12.2,17.8 -11,17.8 21.012,17.806 22.212,17.806 23.412,17.806 -12.8,18.2 -11.6,18.2 -10.4,18.2 20.412,18.206 21.612,18.206 22.812,18.206 -13.4,18.6 -12.2,18.6 -11,18.6 21.012,18.606 22.212,18.606 23.412,18.606 -12.8,19 -11.6,19 -10.4,19 20.412,19.006 21.612,19.006 22.812,19.006 -13.4,19.4 -12.2,19.4 -11,19.4 21.012,19.406 22.212,19.406 23.412,19.406 -12.8,19.8 -11.6,19.8 -10.4,19.8 20.412,19.806 21.612,19.806 22.812,19.806 -13.4,20.2 -12.2,20.2 -11,20.2 21.012,20.206 22.212,20.206 23.412,20.206 -9.4,20.4 -8.6,20.4 -7.8,20.4 -7,20.4 -6.2,20.4 -5.4,20.4 -4.6,20.4 -3.8,20.4 -3,20.4 -2.2,20.4 12.2,20.4 13,20.4 13.8,20.4 14.6,20.4 15.4,20.4 16.2,20.4 17,20.4 17.8,20.4 18.6,20.4 19.4,20.4 -12.8,20.6 -11.6,20.6 -10.4,20.6 20.412,20.606 21.612,20.606 22.812,20.606 -13.4,21 -12.2,21 -11,21 -9.8,21 -9,21 -8.2,21 -7.4,21 -6.6,21 -5.8,21 -5,21 -4.2,21 -3.4,21 -2.6,21 12.6,21 13.4,21 14.2,21 15,21 15.8,21 16.6,21 17.4,21 18.2,21 19,21 19.8,21 21.012,21.006 22.212,21.006 23.412,21.006 -12.8,21.4 -11.6,21.4 -10.4,21.4 20.412,21.406 21.612,21.406 22.812,21.406 -9.4,21.6 -8.6,21.6 -7.8,21.6 -7,21.6 -6.2,21.6 -5.4,21.6 -4.6,21.6 -3.8,21.6 -3,21.6 -2.2,21.6 12.2,21.6 13,21.6 13.8,21.6 14.6,21.6 15.4,21.6 16.2,21.6 17,21.6 17.8,21.6 18.6,21.6 19.4,21.6 -13.4,21.8 -12.2,21.8 -11,21.8 21.012,21.806 22.212,21.806 23.412,21.806 -12.8,22.2 -11.6,22.2 -10.4,22.2 -9.8,22.2 -9,22.2 -8.2,22.2 -7.4,22.2 -6.6,22.2 -5.8,22.2 -5,22.2 -4.2,22.2 -3.4,22.2 12.6,22.2 13.4,22.2 14.2,22.2 15,22.2 15.8,22.2 16.6,22.2 17.4,22.2 18.2,22.2 19,22.2 19.8,22.2 20.412,22.206 21.612,22.206 22.812,22.206 -13.4,22.6 -12.2,22.6 -11,22.6 21.012,22.606 22.212,22.606 23.412,22.606 -9.4,22.8 -8.6,22.8 -7.8,22.8 -7,22.8 -6.2,22.8 -5.4,22.8 -4.6,22.8 -3.8,22.8 -3,22.8 -2.2,22.8 12.2,22.8 13,22.8 13.8,22.8 14.6,22.8 15.4,22.8 16.2,22.8 17,22.8 17.8,22.8 18.6,22.8 19.4,22.8 -12.8,23 -11.6,23 -10.4,23 20.412,23.006 21.612,23.006 22.812,23.006 -12.2,23.4 -11,23.4 -9.8,23.4 -9,23.4 -8.2,23.4 -7.4,23.4 -6.6,23.4 -5.8,23.4 -5,23.4 -4.2,23.4 -3.4,23.4 12.6,23.4 13.4,23.4 14.2,23.4 15,23.4 15.8,23.4 16.6,23.4 17.4,23.4 18.2,23.4 19,23.4 19.8,23.4 21.012,23.406 22.212,23.406 23.412,23.406
NetC5_2: C5.2 J1.6 J1.7 J1.8 U4.8 | length 110.9
  Top Layer w0.2: C5.2 -0.576,32.049 -0.552,32.025 U4.8
  Top Layer w0.5: -34.4,-43.9 -34.4,29.7 -34.1,30 -31.7,32.4 -0.927,32.4 C5.2
NetC10_2: C10.2 J2.6 J2.7 J2.8 U8.8 | length 111.3
  Top Layer w0.2: U8.8 10.527,-22.062 10.551,-22.086 C10.2
  Top Layer w0.5: C10.2 10.902,-22.437 42.288,-22.437 44.45,-20.275 44.45,-20 J2.7
NetJ1_1: J1.1 R2.1 U1.1 U2.2 U3.B3 | length 136.3
  Top Layer w0.14: -32.65,-43.9 -32.65,29.344 -31.994,30 -30.994,31 -21.2,31 -20.2,30 -15.583,25.382 -1.891,25.382 -1.28,25.993 -1.28,26.093 -1,26.373 R2.1 R2.1@-0.627,26.1 ; U1.1@0,16.828 -0.128,16.828 -0.62,17.32 -0.62,26.093 R2.1@-0.627,26.1 ; U3.B3 3.753,17.241 3.714,17.281 3.626,17.403 3.6,17.44 3.6,17.485 3.6,17.618 ; v2(4.204,17.726) 3.708,17.726 3.6,17.618 ; v2(5.396,17.448) 5.396,17.404 6.1,16.7 7.675,16.7 8.075,17.1 U2.2 ; R2.1@-0.627,26.1 0.6,26.1 4.5,22.2 4.5,20.7 3.6,19.8 3.6,17.618
  Bottom Layer w0.1: v2(4.204,17.726) 4.204,17.71 4.514,17.4 5.347,17.4 v2(5.396,17.448)
NetJ1_3: J1.3 R1.1 U1.6 U2.1 U3.A3 | length 134
  Top Layer w0.14: -33.25,-43.9 -33.25,29.35 -32.6,30 -31.2,31.4 -20.982,31.4 -19.582,30 -16.182,26.6 -2.827,26.6 -2.32,26.093 -2.32,26.553 -2.22,26.653 -1.873,27 -0.162,27 0.138,26.7 v2(0.2,26.7) ; U1.6 0,19.94 -0.13,20.07 -0.218,20.07 -0.3,20.152 -0.3,24.4 v2(0.6,25.3) 0.635,25.265 0.935,25.265 4.1,22.1 4.1,20.8 3.1,19.8 v2(3.1,18.2) 3.1,17.5 3.595,16.881 3.636,16.84 3.684,16.835 U3.A3 ; v2(5.6,18.1) 6.325,17.375 U2.1
  Bottom Layer w0.1: v2(0.2,26.7) 0.2,26.246 0.1,26.146 0.1,25.8 v2(0.6,25.3) ; v2(3.1,18.2) 3.15,18.15 5.55,18.15 v2(5.6,18.1)
NetJ1_5: J1.5 R5.1 U3.A2 | length 124.3
  Top Layer w0.14: -33.85,-43.9 -33.85,29.316 -33.166,30 -31.366,31.8 -20.8,31.8 -19,30 -16.386,27.386 0.314,27.386 1.031,26.669 1.031,26.369 v2(1.1,26.3) ; v2(1.1,24.5) 3.473,22.127 R5.1 3.473,20.673 2.6,19.8 2.6,17.4 3.5,16.5 4.315,16.5 4.395,16.581 U3.A2
  Bottom Layer w0.1: v2(1.1,24.5) v2(1.1,26.3)
NetJ1_9: J1.9 U4.7 | length 112
  Top Layer w0.14: -35.05,-43.9 -35.05,30 -35.05,30.15 -32.2,33 0.06,33 0.385,32.675 U4.7
NetJ1_11: J1.11 R3.1 U2.10 | length 136.1
  Top Layer w0.14: -35.65,-43.9 -35.65,30 -35.65,30.25 -32.4,33.5 -19.3,33.5 -17.9,34.9 7.6,34.9 10.5,32 10.5,30 10.5,23.842 10.258,23.6 9.127,23.6 8.264,22.737 R3.1 ; R3.1@8.3,22.7 8.4,22.7 8.725,22.375 U2.10
NetJ1_13: J1.13 R4.1 U2.9 | length 136.4
  Top Layer w0.14: -36.25,-43.9 -36.25,30 -36.25,30.35 -32.6,34 -19.5,34 -18.1,35.4 7.7,35.4 10.8,32.3 10.8,30 10.8,23.646 10.18,23.026 10.18,22.926 9.9,22.646 R4.1 ; U2.9 9.375,22.175 R4.1@9.823,22.623
NetJ2_1: J2.1 R7.1 U5.1 U6.2 U7.B3 U9.4 U9.6 | length 161.8
  Top Layer w0.14: U5.1 -8.72,-17.3 v2(-1.425,-17.3) ; v2(0.025,-17.3) 0.038,-17.313 1.238,-17.313 v2(1.25,-17.325) ; U6.2 1.9,-7.137 2.3,-6.737 3.875,-6.737 4.58,-7.441 v2(4.58,-7.485) ; v2(2.225,-16.7) 2.85,-16.075 v2(3.625,-16.075) ; v2(5.35,-15.375) 6.127,-15.375 7.37,-14.132 ; v2(5.771,-7.763) 6.267,-7.763 6.375,-7.655 ; U7.B3 6.222,-7.278 6.262,-7.318 6.349,-7.44 6.375,-7.477 6.375,-7.522 6.375,-7.655 ; U9.4 8.27,-8.725 8.27,-9 8.263,-9.007 8.263,-9.737 7.8,-10.2 7.8,-11.7 9.822,-13.722 ; U9.6 9.65,-8.845 9.822,-9.017 9.822,-13.722 ; R7.1@10.602,-16.137 9.375,-16.137 9.265,-16.027 ; R7.1@10.625,-16.159 R7.1 10.975,-16.41 11.255,-16.13 11.255,-16.03 11.866,-15.419 24.294,-15.419 29.912,-21.037 41.588,-21.037 42.625,-20 42.625,53.85 ; 6.375,-7.655 6.375,-9.837 5.475,-10.737 5.475,-12.237 7.37,-14.132 ; 7.37,-14.132 9.265,-16.027 ; 9.265,-16.027 9.822,-15.47 9.822,-13.722
  Bottom Layer w0.1: v2(4.58,-7.485) 4.628,-7.437 5.461,-7.437 5.771,-7.747 v2(5.771,-7.763)
  Bottom Layer w0.14: v2(-1.425,-17.3) v2(0.025,-17.3) ; v2(1.25,-17.325) 1.806,-16.769 2.156,-16.769 v2(2.225,-16.7) ; v2(3.625,-16.075) 4.325,-15.375 v2(5.35,-15.375)
NetJ2_2: J2.2 R11.1 U9.3 | length 122.1
  Top Layer w0.14: v2(7.4,-14.8) 7.4,-16.2 8,-16.8 R11.1 8,-17 8.4,-17.4 24.475,-17.4 v2(27.875,-20.8) ; v2(7.525,-12.5) 7.475,-12.45 7.475,-10.125 7.875,-9.725 7.875,-7.318 8.138,-7.055 8.15,-7.055 8.35,-6.855 U9.3 ; v2(29.2,-19.7) 30.2,-20.7 41.35,-20.7 42.15,-19.9 42.15,45.775 v2(42.025,45.9)
  Bottom Layer w0.14: v2(7.4,-14.8) 7.462,-14.738 7.462,-12.562 v2(7.525,-12.5) ; v2(27.875,-20.8) 28.906,-19.769 29.131,-19.769 v2(29.2,-19.7) ; v2(42.025,45.9) 42.675,46.55 42.675,52.501 42.95,52.776 J2.2
NetJ2_3: J2.3 R6.1 U5.6 U6.1 U7.A3 U9.1 | length 161
  Top Layer w0.14: U5.6 -10.7,-18.2 v2(-1.4,-18.2) ; v2(-0.025,-18.2) 0,-18.225 2.325,-18.225 v2(2.35,-18.25) ; U6.1 3.65,-7.412 v2(4.375,-8.137) ; v2(4.45,-18.1) 4.512,-18.1 4.712,-17.9 v2(9.5,-17.9) ; U7.A3 6.291,-6.872 6.34,-6.877 6.38,-6.917 6.875,-7.537 v2(6.875,-8.237) 6.875,-9.837 5.875,-10.837 5.875,-12.137 9.04,-15.301 9.337,-15.301 v2(9.355,-15.32) ; U9.1 9.65,-6.855 9.85,-7.055 9.862,-7.055 10.17,-7.363 v2(10.17,-15.737) ; v2(13.3,-15.875) 13.21,-15.875 12.725,-16.36 12.525,-16.36 12.802,-16.637 25.012,-16.637 28.375,-20 29.812,-21.437 41.763,-21.437 43.25,-19.95 J2.3
  Bottom Layer w0.1: v2(4.375,-8.137) 4.425,-8.187 6.825,-8.187 v2(6.875,-8.237)
  Bottom Layer w0.14: v2(-1.4,-18.2) v2(-0.025,-18.2) ; v2(2.35,-18.25) 2.447,-18.25 2.597,-18.1 v2(4.45,-18.1) ; v2(9.355,-15.32) 9.37,-15.334 9.823,-15.334 10.17,-15.682 v2@10.17,-15.722 ; v2(9.5,-17.9) 9.5,-17.849 10.17,-17.179 v2(10.17,-15.737) v2@10.17,-15.722 ; v2(13.3,-15.875) 10.406,-15.875 10.253,-15.722 v2@10.17,-15.722
NetJ2_5: J2.5 R10.1 U7.A2 | length 124.6
  Top Layer w0.14: U7.A2 5.58,-6.617 5.661,-6.537 6.475,-6.537 7.307,-7.369 7.307,-9.905 6.502,-10.71 R10.1 6.502,-12.164 v2(8.875,-14.537) ; v2(8.875,-16.337) 8.944,-16.406 8.944,-16.706 9.264,-17.025 24.85,-17.025 27.825,-20 29.662,-21.837 41.988,-21.837 43.85,-19.975 J2.5
  Bottom Layer w0.14: v2(8.875,-16.337) v2(8.875,-14.537)
NetJ2_9: J2.9 U8.7 | length 112.2
  Top Layer w0.14: U8.7 9.59,-22.712 9.915,-23.037 42.513,-23.037 45.05,-20.5 45.05,-20 J2.9
NetJ2_11: J2.11 R8.1 U6.10 | length 136.2
  Top Layer w0.14: U6.10 1.25,-12.412 1.575,-12.737 R8.1@1.675,-12.737 ; R8.1 1.712,-12.773 0.848,-13.637 -0.283,-13.637 -0.525,-13.879 -0.525,-20.037 -0.525,-22.037 2.375,-24.937 27.875,-24.937 29.275,-23.537 42.538,-23.537 45.65,-20.425 45.65,-20 J2.11
NetJ2_13: J2.13 R9.1 U6.9 | length 136.4
  Top Layer w0.14: R9.1@0.152,-12.66 0.6,-12.212 U6.9 ; R9.1 0.075,-12.683 -0.205,-12.963 -0.205,-13.063 -0.825,-13.683 -0.825,-20.037 -0.825,-22.337 2.275,-25.437 28.075,-25.437 29.475,-24.037 42.688,-24.037 46.25,-20.475 46.25,-20 J2.13
pads on no net: J1.2 J1.4 J1.10 J1.12 J1.14 J2.4 J2.10 J2.12 J2.14 U1.3 U1.4 U4.2 U4.3 U4.4 U4.6 U4.9 U5.3 U5.4 U8.2 U8.3 U8.4 U8.6 U8.9

## Polygon pours and split planes (outlines as drawn)
no net on Layer0 "Default Coverlay 1 Top" (split plane): -43.505,-48.421 -43.438,-48.76 -43.305,-49.08 -43.113,-49.368 -42.868,-49.613 -42.58,-49.805 -42.26,-49.938 -41.921,-50.005 -37.579,-50.005 -37.24,-49.938 -36.92,-49.805 -36.632,-49.613 -36.387,-49.368 -36.195,-49.08 -36.062,-48.76 -35.995,-48.421 -35.995,-43.505 43.505,-43.505 43.505,48.421 43.438,48.76 43.305,49.08 43.113,49.368 42.868,49.613 42.58,49.805 42.26,49.938 41.921,50.005 37.579,50.005 37.24,49.938 36.92,49.805 36.632,49.613 36.387,49.368 36.195,49.08 36.062,48.76 35.995,48.421 35.995,43.505 -43.505,43.505 -43.505,31.5
no net on Layer0 "Default Coverlay 1 Bottom" (split plane): -43.505,-48.421 -43.438,-48.76 -43.305,-49.08 -43.113,-49.368 -42.868,-49.613 -42.58,-49.805 -42.26,-49.938 -41.921,-50.005 -37.579,-50.005 -37.24,-49.938 -36.92,-49.805 -36.632,-49.613 -36.387,-49.368 -36.195,-49.08 -36.062,-48.76 -35.995,-48.421 -35.995,-43.505 43.505,-43.505 43.505,48.421 43.438,48.76 43.305,49.08 43.113,49.368 42.868,49.613 42.58,49.805 42.26,49.938 41.921,50.005 37.579,50.005 37.24,49.938 36.92,49.805 36.632,49.613 36.387,49.368 36.195,49.08 36.062,48.76 35.995,48.421 35.995,43.505 -43.505,43.505 -43.505,31.5
GND on Bottom Layer "GND_L02_P003" (solid, pour order 3): 46.95,52.463 42.525,52.463 42.525,-19.087 40.575,-20.637 32.337,-20.637 27.937,-16.237 -14.375,-16.237 -14.375,-25.837 41.675,-25.837 46.95,-20.6
GND on Bottom Layer "GND_L02_P002" (solid, pour order 2): -36.95,-42.5 -32.7,-42.5 -32.7,29.05 -31,30.6 -21.4,30.6 -17,26.2 11.2,26.2 11.2,35.8 -31.7,35.8 -36.95,30.564

## Silkscreen, mask and mechanical layers (free items; w line width, h text height)
Mechanical 1:
  lines w0.01: -36.747,-45 -33.5,-45 ; -32.35,-37.45 -32.35,-44.85 -32.5,-45 -37,-45 -37.15,-44.85 -37.15,-37.45 -38.5,-36.1 -38.5,30 -38.5,46.747 cw(c-36.747,46.747) -36.747,48.5 38.247,48.5 cw(c38.247,46.747) 40,46.747 40,-19.5 ccw(c40.5,-19.5) 40.5,-20 ccw(c40.5,-19.5) 41,-19.5 41,46.1 42.35,47.45 42.35,54.85 42.5,55 45.5,55 47,55 47.15,54.85 47.15,47.45 48.5,46.1 48.5,-20 ; -32.35,-37.45 -32.35,-37.45 ; -32.35,-37.45 -31,-36.1 ; -31,-36.1 -31,-30 -31,29.5 cw(c-30.5,29.5) -30.5,30 cw(c-30.5,29.5) -30,29.5 -30,-36.747 ; -31,-36.1 -31,-36.1 ; -30,-36.747 ccw(c-28.247,-36.747) -28.247,-38.5 46.747,-38.5 ccw(c46.747,-36.747) 48.5,-36.747 48.5,-20 ; -30,-36.747 -30,-36.747 ; 48.5,-20 ccw(c48.5,-20) 48.5,-20 ; 48.5,-20 48.5,-20 ; -30,-20 ccw(c-30,-20) -30,-20
Stiffener:
  lines w0.254: -37.15,-44.671 ccw(c-36.896,-44.671) -36.896,-44.925 -32.679,-44.925 ccw(c-32.679,-44.671) -32.425,-44.671 -32.425,-37.704 ccw(c-32.679,-37.704) -32.679,-37.45 -36.896,-37.45 ccw(c-36.896,-37.704) -37.15,-37.704 -37.15,-44.671 ; 42.375,47.804 ccw(c42.629,47.804) 42.629,47.55 46.846,47.55 ccw(c46.846,47.804) 47.1,47.804 47.1,54.771 ccw(c46.846,54.771) 46.846,55.025 42.629,55.025 ccw(c42.629,54.771) 42.375,54.771 42.375,47.804
  text "On Bottom: 4.5x7.5 Pi Stiffener (T=0.1) T=0.2 (total)" at 11.425,48.55 h1.52
  text "On Bottom: 4.5x7.5 Pi Stiffener (T=0.1) T=0.2 (total)" at -31.45,-45 h1.52